# EAGLE board esp_prod_cumulus (EAGLE 6.4)
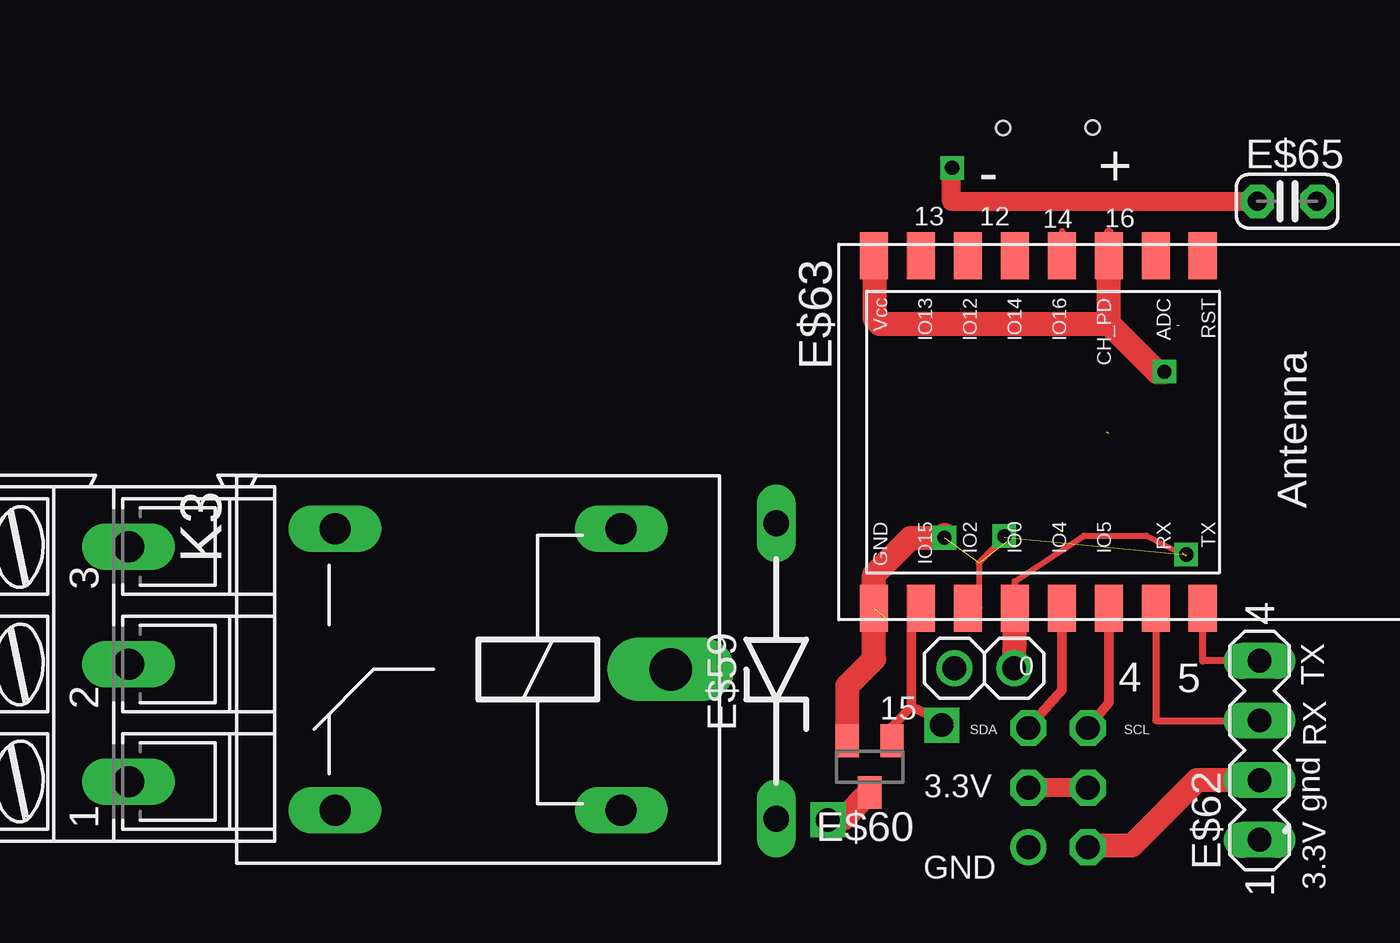
[diagram p0: board, top side]
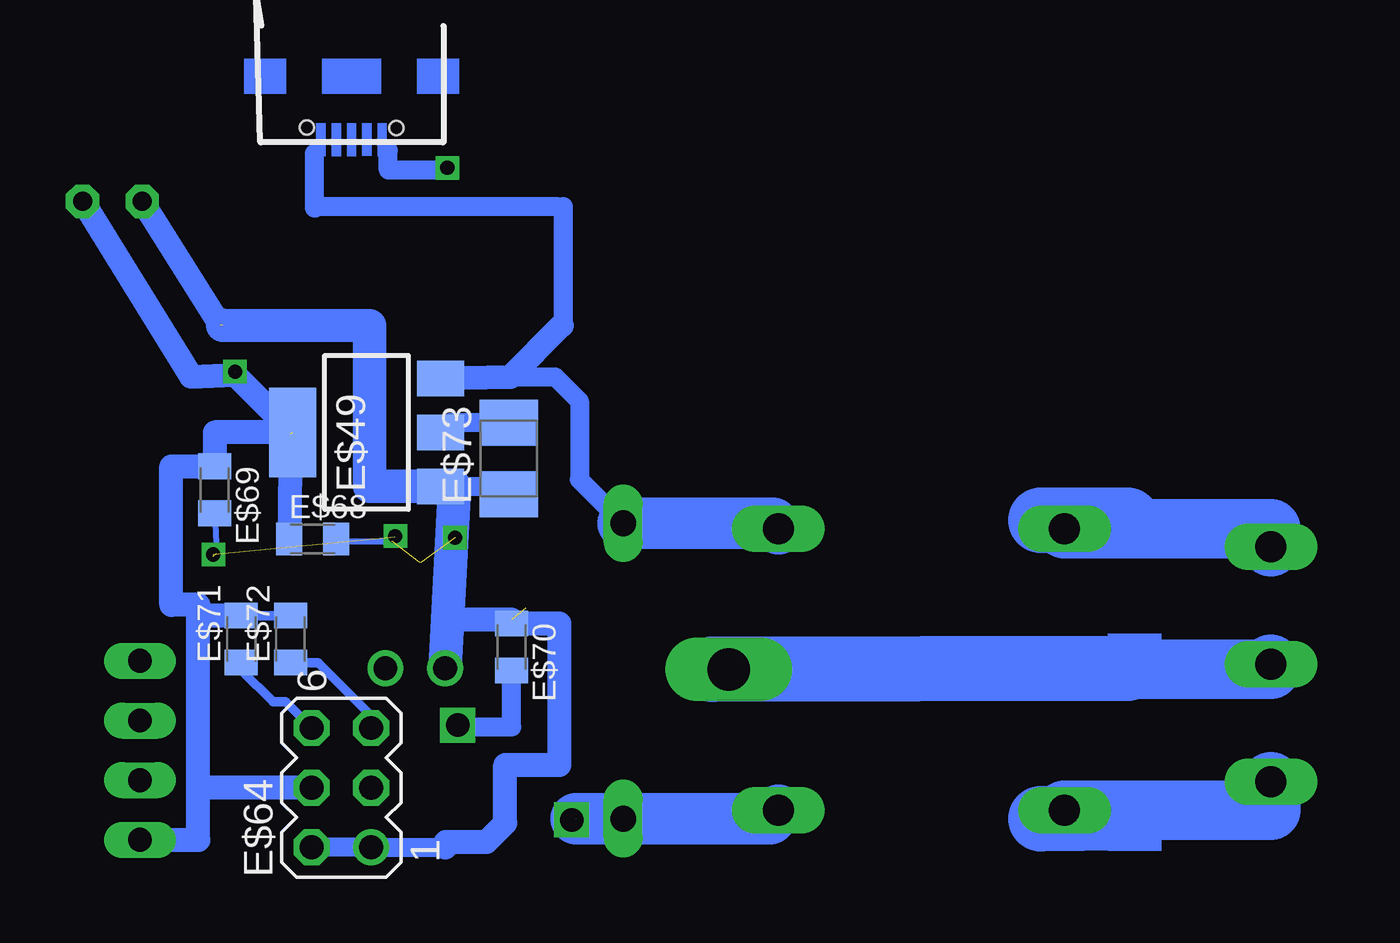
[diagram p1: board, bottom side, seen from below]

No outline drawn. Coordinates in mm, seen from the top.
Copper layers (1*16): Top 0.005mm / dielectric 1.5mm / Bottom 0.005mm
Design rules "default *": minimum track width 4mil, minimum drill 0.2mm, track to track 4mil, track to pad 4mil, pad to pad 4mil, via to via 4mil, smd to smd 8mil, copper to edge 40mil, drill to drill 8mil, minimum pad ring 10mil, minimum via ring 8mil, stop-mask expansion 4mil, vias tented up to drill 0mil, thermal gap 10mil
Net classes: 1 ground: width 0.61 mm
Holes 0.6 mm at 46.83,34.1 43.03,34.08

## Footprints (pad centres in the part's own frame; a part is rotated, then mirrored left to right if it is on the bottom)
AK300/3 = drill 1.321 long: 1 -5.004,0; 2 0,0; 3 5.004,0
SOT223 = smd 1.5 x 2: 1 -2.3,-3.15; 2 0,-3.15; 3 2.3,-3.15 | smd 3.8 x 2: 4 0,3.15
ZDIO12.5 = drill 1.1 long: A 6.223,0; C -6.35,0
SOT23 = smd 1 x 1.4: 1 -0.95,-1.1; 2 0.95,-1.1; 3 0,1.1
MA04-1 = drill 1.016 long: 1 -3.81,0; 2 -1.27,0; 3 1.27,0; 4 3.81,0
ESP-12 = smd 2 x 1.2: 1 -7.5,4.5; 2 -7.5,2.5; 3 -7.5,0.5; 4 -7.5,-1.5; 5 -7.5,-3.5; 6 -7.5,-5.5; 7 -7.5,-7.5; 8 -7.5,-9.5; 9 7.5,-9.5; 10 7.5,-7.5; 11 7.5,-5.5; 12 7.5,-3.5; 13 7.5,-1.5; 14 7.5,0.5; 15 7.5,2.5; 16 7.5,4.5
MA03-2 = drill 1.016: 1 -2.54,-1.27 | drill 1.016 octagon: 2 -2.54,1.27; 3 0,-1.27; 4 0,1.27; 5 2.54,-1.27; 6 2.54,1.27
C025-024X044 = drill 0.813 pad 1.422 octagon: 1 -1.27,0; 2 1.27,0
C0805K = smd 1.1 x 1.4: 1 -1,0; 2 1,0
B/3528-21R = smd 1.95 x 2.5: + 1.525,0; - -1.525,0
ZF112 = drill 1.321 long: 1 -6.096,5.994; 2 -6.096,-5.994; O 6.096,5.994; S 6.096,-5.994 | drill 1.803 long: P -8.204,0
1X02 = drill 1.016: 1 -2.54,0; 2 0,0

## Placement (x,y rotation side)
E$1  [AK300/3]  5.77,11.25 90 top
E$49  [SOT223]  44.3,21.12 90 bottom
E$59  [ZDIO12.5]  33.36,11.03 90 top
E$60  [SOT23]  37.34,6.89 180 top
E$62  [MA04-1]  53.95,7.58 90 top
E$63  [ESP-12]  47.02,21.13 270 top
E$64  [MA03-2]  45.37,6 90 bottom
E$65  [C025-024X044]  55.12,30.96 0 top
E$68  [C0805K]  46.59,16.58 0 bottom
E$69  [C0805K]  50.76,18.67 270 bottom
E$70  [C0805K]  38.12,11.98 270 bottom
E$71  [C0805K]  49.63,12.32 90 bottom
E$72  [C0805K]  47.53,12.32 90 bottom
E$73  [B/3528-21R]  38.23,20.01 90 bottom
K3  ZF112  [ZF112]  20.66,11.03 180 top
X8  332-02  [1X02]  40.95,11.07 180 top

## Library data of the parts
E$1 = con-ptr500
E$49 = v-reg
E$59 = diode
E$60 = semicon-smd-ipc
E$62 E$64 = con-lstb
E$63 E$65 E$68-E$73 = adafruit
K3 = relay; OC_FARNELL: unknown; OC_NEWARK: unknown
X8 = aaaa

## Nets
S$6: E$1.3 K3.S
S$7: E$1.2 K3.P
S$8: E$1.1 K3.O
S$9: E$60.1 E$63.10
S$10: E$63.4
S$83: E$49.1 E$60.2 E$62.2 E$63.9 E$64.1 E$64.2 E$65.1 E$70.1 E$73.- X8.2
S$91: E$59.C E$60.3 K3.1
S$104: E$70.2
S$105: E$62.3 E$63.15
S$106: E$62.4 E$63.16
S$109: E$49.3 E$59.A K3.2
S$112: E$63.1
S$113: E$63.12 E$69.2 X8.1
S$114: E$63.13 E$64.5 E$72.1
S$115: E$63.14 E$64.6 E$71.1
S$130: E$63.11 E$68.2
S$131: E$49.4 E$62.1 E$63.3 E$63.8 E$64.3 E$64.4 E$65.2 E$68.1 E$69.1 E$71.2 E$72.2
S$132: E$49.2 E$73.+

## Tracks (layer width: path | path; a pad name or v marks a point on that pad's centre or on a via)
S$6
  Bottom 2.54: K3.S 5.77,17.02 E$1.3
S$7
  Bottom 2.54: K3.P 5.77,11.03 E$1.2
S$8
  Bottom 2.54: K3.O 5.77,5.03 E$1.1
S$9
  Top 0.406: E$60.1 38.29,8.6 39.13,9.44 | E$63.10 39.13,13.24 39.13,9.44 | 40.2,8.93 39.13,9.44
S$10
  Top 0.254: 45.54,29.69 45.54,28.66 E$63.4
S$11
  Bottom 0.813: 36.25,30.73 46.45,30.73
S$12
  Bottom 0.406: 43.63,33.58 43.64,33.8
S$13
  Bottom 0.813: 36.19,30.73 35.91,30.73 35.91,25.69
S$14
  Top 0.813: 53.75,30.95 40.83,30.95 40.83,32.44
S$15
  Bottom 0.813: 40.83,32.29 43.37,32.29 43.37,33.12
S$16
  Bottom 0.813: 46.48,30.67 46.51,30.67 46.51,32.99
S$17
  Bottom 0.813: 40.59,8.59 38.11,8.59 38.11,10.88
S$83  (2 unrouted)
  Top 1.016: E$60.2 36.39,10.33 37.52,11.47 E$63.9 37.52,15.07 39.09,16.63 40.43,16.63 40.54,16.74 | E$62.2 51.28,6.31 48.5,3.53 46.71,3.53 E$64.2
  Bottom 0.813: 40.93,3.44 44.06,3.44 E$64.1 E$64.2 | E$49.1 38.56,18.82 E$73.-
  Bottom 1.016: 40.93,3.44 40.91,3.68 39.2,3.68 38.39,4.48 38.39,6.97 36.08,6.97 36.08,12.98 E$70.1 38.12,13.15 40.84,13.15 | E$65.1 50.53,25.68
  Bottom 1.422: 50.41,25.68 44.17,25.67 44.17,18.82 E$49.1 40.54,18.82 40.84,13.15 X8.2
S$91  (1 unrouted)
  Top 1.016: E$60.3 36.23,4.68 35.38,4.68
  Bottom 2.184: K3.1 27.11,4.68 E$59.C 35.38,4.68
S$92
  Bottom 2.794: 29.55,11.03 11.88,11.07
S$94
  Bottom 2.794: 15.58,4.68 11.88,4.72
S$95
  Bottom 2.794: 15.58,17.38 11.88,17.38
S$102  (via drill 1)
  other vias: 35.56,4.62 40.41,8.66
S$104
  Bottom 0.254: E$70.2 38.12,8.52 40.93,8.52
S$105
  Top 0.305: E$63.15 49.52,8.85 E$62.3
  Top 0.406: E$63.15
S$106
  Top 0.305: E$62.4 51.52,11.39 E$63.16
S$109
  Bottom 0.813: 38.17,23.49 36.26,23.49 35.22,22.45 35.22,19.11 E$59.A
  Bottom 1.016: E$49.3 38.17,23.49 35.98,25.68
  Bottom 2.184: K3.2 26.99,17.25 E$59.A
S$112
  Top 0.61: 51.48,28.67 E$63.1
S$113  (1 unrouted)
  Top 0.254: E$63.12 43.52,14.79 46.47,16.72 49.12,16.72 50.82,15.84
  Top 1.016: X8.1 43.52,12.23 E$63.12
  Bottom 0.254: E$69.2 50.69,15.97
S$114
  Top 0.406: 45.52,12.82 E$63.13 45.52,10.14 E$64.5
  Bottom 0.406: E$64.5 44.1,9.06 46.35,11.32 E$72.1
S$115
  Top 0.305: 47.53,13.64 E$63.14
  Top 0.406: 47.53,13.62 E$63.14 47.52,9.61 E$64.6
  Bottom 0.406: E$71.1 49.63,10.99 48.28,9.65 47.75,9.65 E$64.6
S$117  (via drill 0.6)
  other vias: 49.89,23.71 40.85,32.38
S$125  (via drill 0.6)  (2 unrouted)
  Top 0.254: v43.07,16.7 43.07,16.65 41.99,15.56
  other vias: 40.53,16.63 50.82,15.92
S$130  (1 unrouted)
  Top 0.254: E$63.11 42.02,13.63 42.02,15.56
  Bottom 0.254: E$68.2 45.49,16.48 43.21,16.48 43.08,16.62 | 43.08,16.62 | 43.08,16.62 43.11,16.65
S$131  (2 unrouted)
  Top 0.406: E$63.3 47.52,29.63
  Top 0.813: E$64.4 E$64.3
  Top 1.016: E$63.8 37.55,28.6 37.55,25.96 37.77,25.74 47.53,25.74 | 47.53,25.74 47.52,25.75 E$63.3 | 47.53,25.74 49.58,23.69 49.89,23.69
  Bottom 0.406: E$72.2 E$71.2
  Bottom 0.813: E$49.4 48.12,21.12
  Bottom 1.016: E$49.4 49.89,23.56 | 49.89,23.56 49.89,23.69 | 49.89,23.56 51.77,23.49 E$65.2 | 48.12,21.12 50.76,21.12 E$69.1 52.62,19.68 52.62,13.77 51.47,13.77 51.47,13.32 | 47.52,21.07 E$68.1 | E$64.4 51.47,6 | 51.47,6 51.47,13.32 | E$71.2 51.47,13.32 | E$62.1 51.47,3.77 51.47,6
S$132
  Bottom 0.813: E$73.+ 40.73,21.54 E$49.2
(copper drawn outside any net)
  shapes: Bottom area x10

## Text on the board
tPlace: - | + | 13 | 12 | 14 | 16 | 0 | 4 | 5 | TX | 15 | SDA | SCL | RX | 3.3V | gnd | GND | 3.3V